# Allegro board NIXIE.brd
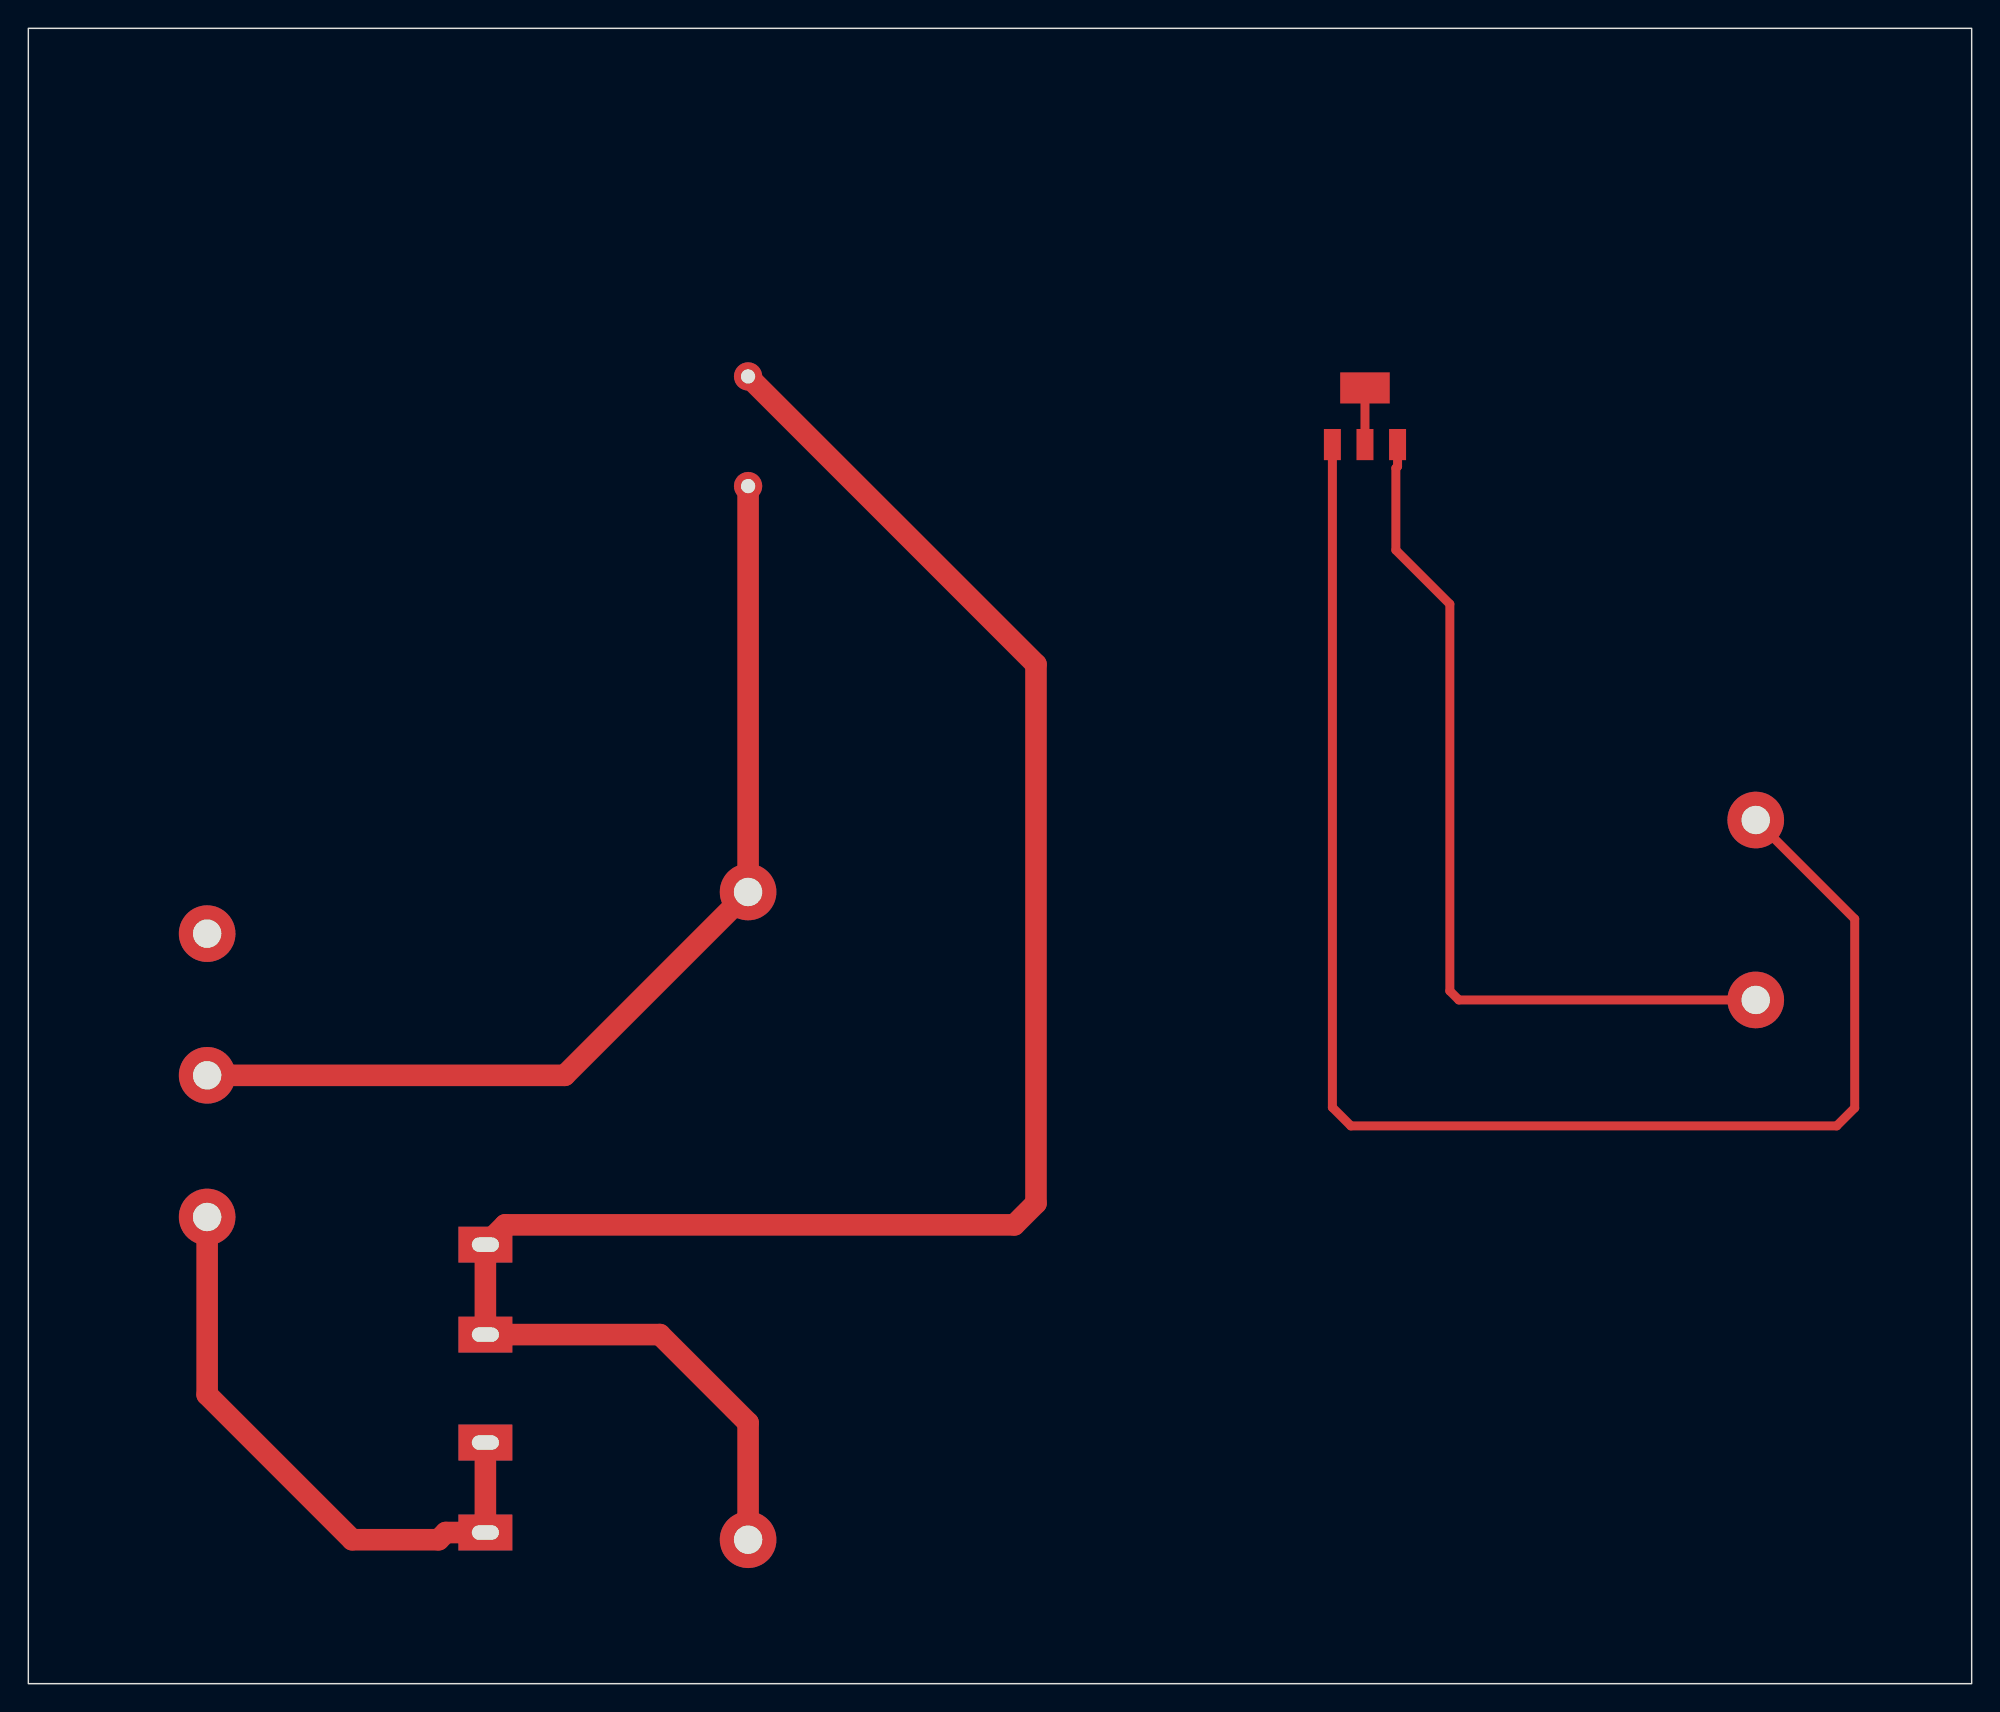
[diagram p0: board, top side]
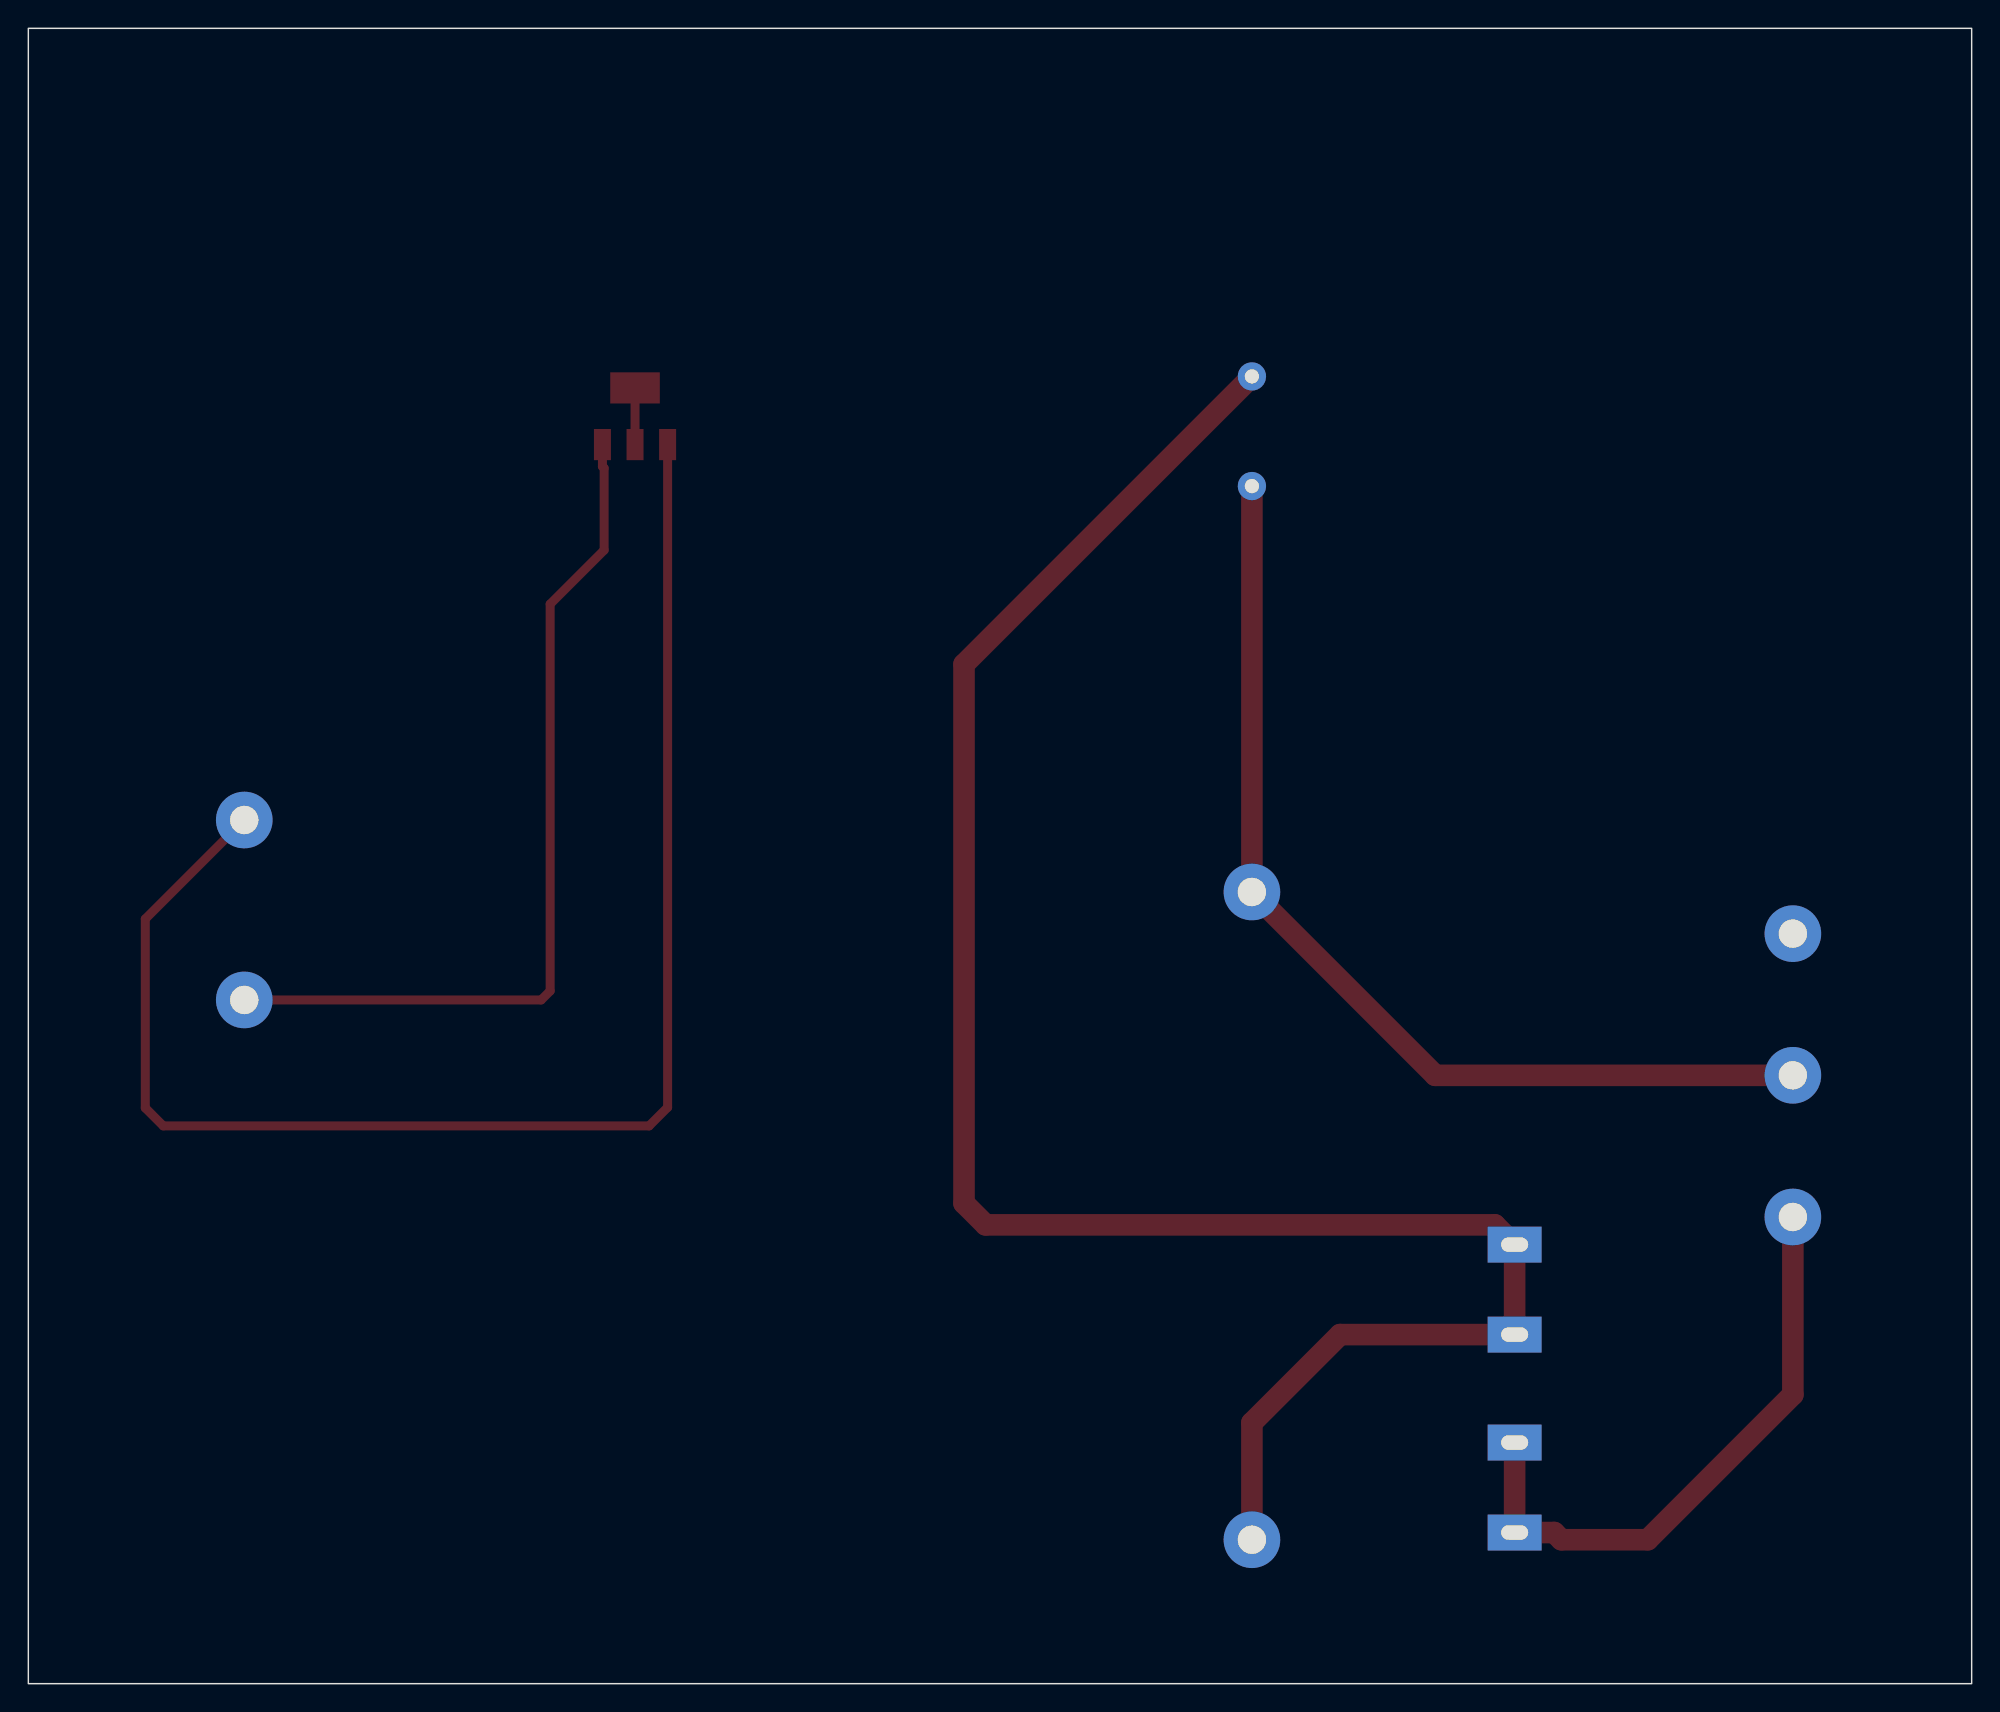
[diagram p1: board, bottom side, seen from below]

Outline 137.16 x 116.84 mm; copper layers: TOP, BOTTOM. Coordinates in mm from the lower left corner of the outline.
Outline path: rectangle 0,0 137.16,116.84

## Design rules (mm)
constraint set DEFAULT: min track width 0.127

## Placement (name value [footprint] x y rotation side)
C1  10uF  [CAP17MM]  33.02 71.12 0 top
F1  fuse-fc211  [FUSE_FC211]  30.48 10.16 0 top
J1  AC IN  [ACIN]  7.62 27.94 0 top
NOREF  -  []  50.8 84.53 90 top
U1  PowerModule  [PM12]  50.8 10.16 0 top
U2  -  [AZ1117]  91.44 86.36 0 top

## Library data of the parts
C1 = C
F1 = fuse-fc211
J1 = CON3
U1 = PowerModule
U2 = AZ1117

## Footprints (pads in the part's own frame, mm; a bottom-side part is the same pattern mirrored in y, then rotated)
ACIN
  round 4 hole 2: 1(5,5) 2(5,15) 3(5,25)
AZ1117
  rect 1.2x2.2 smd: 1(0.6,1.1) 2(2.9,1.1) 3(5.2,1.1)
  rect 3.5x2.2 smd: 4(2.9,5.1)
CAP17MM
  round 2 hole 1: 1(17.78,13.41) 2(17.78,21.15)
FUSE_FC211
  rect 3.81x2.54 hole 1.905x1.016: 1(1.778,0.508) 2(1.778,6.858) 3(1.778,14.478) 4(1.778,20.828)
PM12
  round 4 hole 2: 1(0,0) 2(0,45.72) 3(71.12,38.1) 4(71.12,50.8)

## Nets
3V3: U2.2 U2.4(OUT#4)
12V: U1.3 U2.3
GND_EARTH: J1.3
0: U1.4(GND) U2.1
AC_HOT: F1.1 F1.2 J1.1
AC_NEUT: C1.1 J1.2 U1.2
FUSED_HOT: C1.2 F1.3 F1.4 U1.1

## Routing (per net, layer and track width the routed paths; a pad name or vN(x,y) marks a point on that pad's centre or on a via; arc(x,y) is an arc through that point)
3V3: length 4
  TOP w0.635: U2.2 U2.4
12V: length 62
  TOP w0.635: U1.3 100.97,48.26 100.33,48.89 100.33,76.2 96.52,80.01 96.52,85.8 96.64,85.92 U2.3
0: length 107.9
  TOP w0.635: U2.1 92.04,40.68 93.34,39.37 127.63,39.37 128.91,40.64 128.91,53.97 U1.4
AC_HOT: length 43
  TOP w1.524: J1.1 12.62,20.4 22.86,10.16 28.96,10.16 29.46,10.67 F1.1 F1.2
AC_NEUT: length 72.2
  TOP w1.524: J1.2 37.86,42.94 U1.2 C1.1
FUSED_HOT: length 142.6
  TOP w1.524: C1.2 71.12,71.95 71.12,33.91 69.6,32.38 33.66,32.38 F1.4 F1.3 44.58,24.64 50.8,18.41 U1.1
